# Altium PCB MT6816_Angle_Encoder.PcbDoc
Units mil, origin at the board's own origin, x right, y up, seen from the top; angles counter-clockwise.
Board outline 1175.45 x 1259.84 mil, 2 copper layers (Top Layer, Bottom Layer); 9 components, 8 nets, 34 pads, 6 vias.
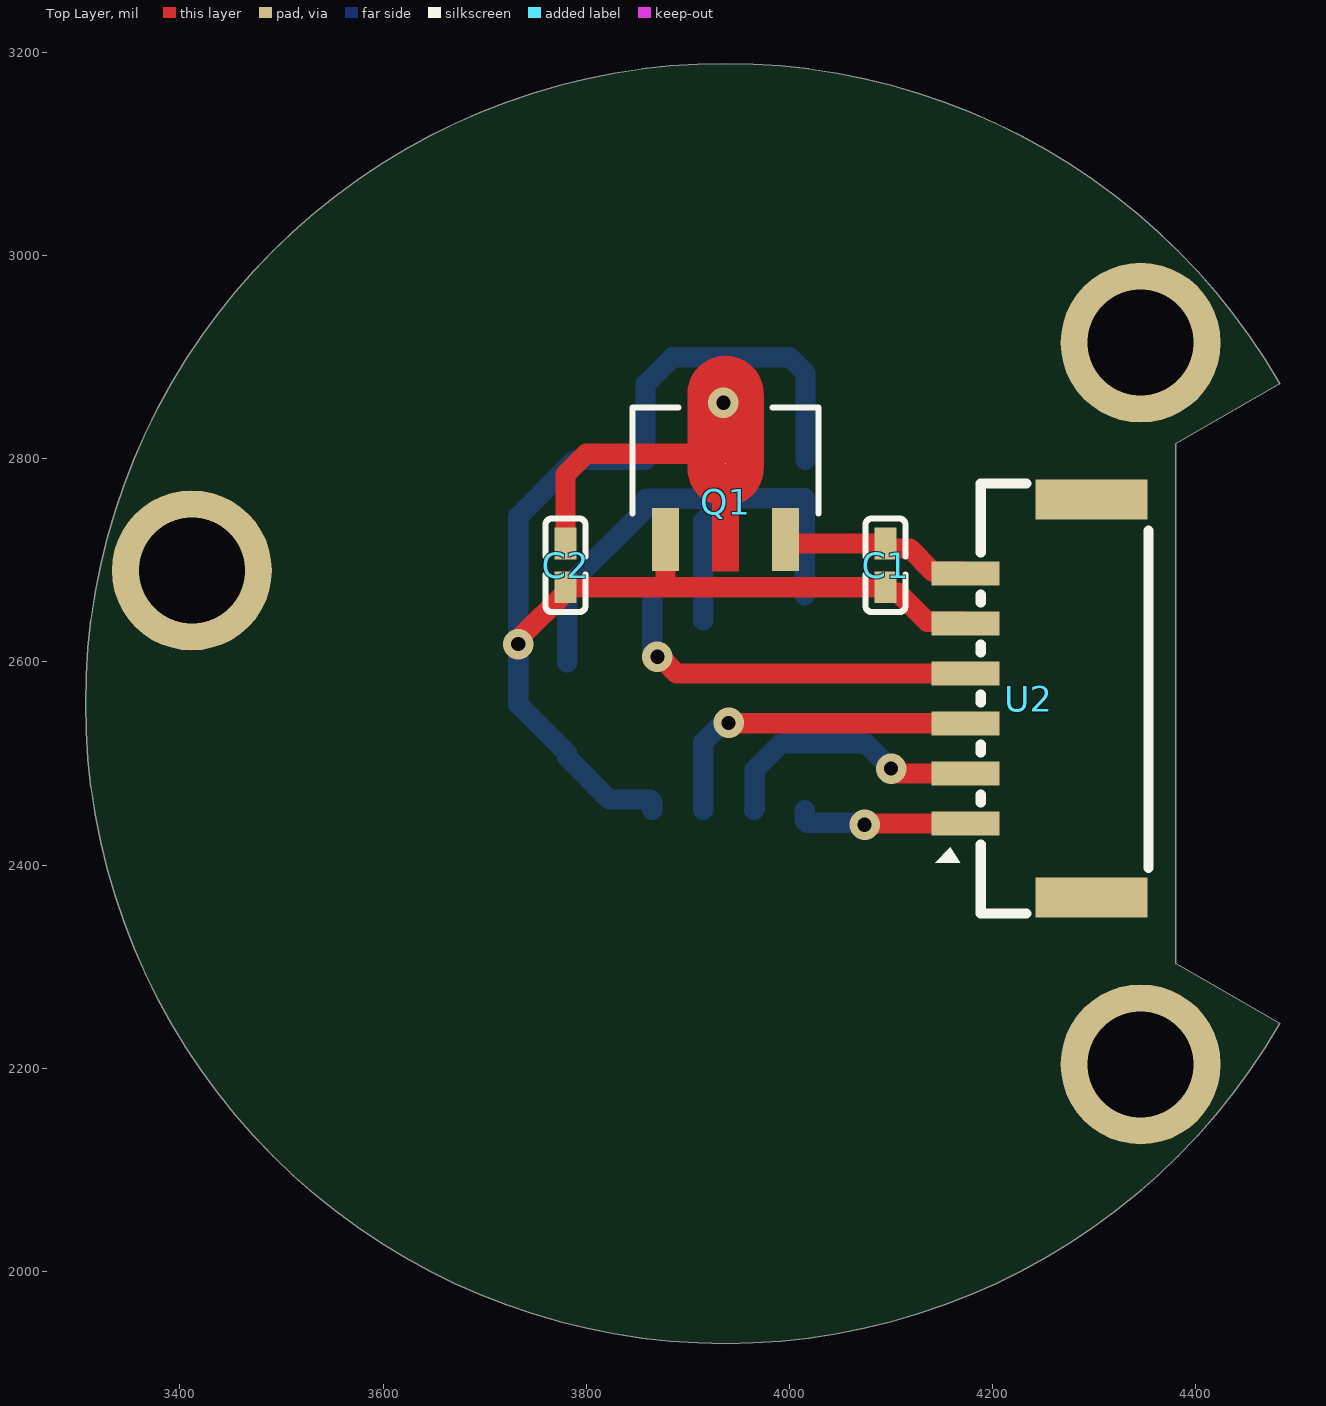
[diagram p0: Top Layer view]
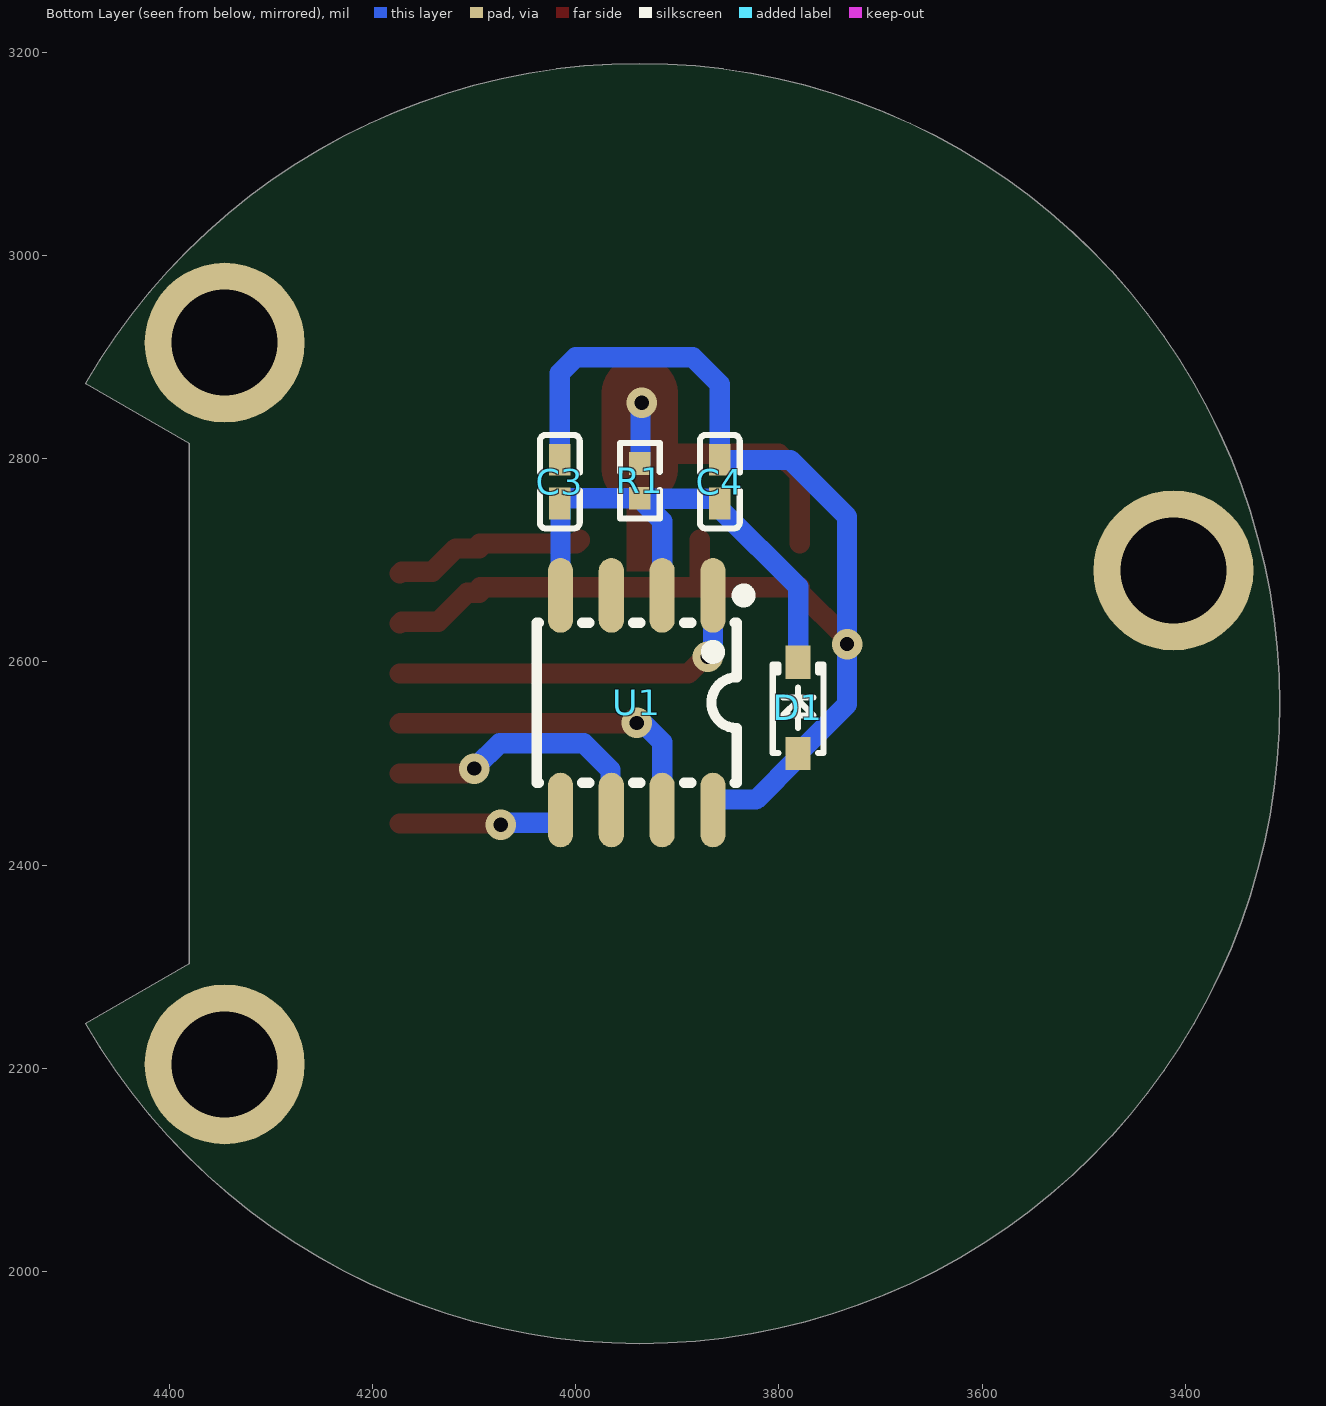
[diagram p1: Bottom Layer view, seen from below]

## Layer stack, top to bottom
Top Solder: solder mask 0.4, Solder Resist, Dk 3.5
Top Layer: signal copper 1.4
Dielectric 1: dielectric 12.6, FR-4, Dk 4.8
Bottom Layer: signal copper 1.4
Bottom Solder: solder mask 0.4, Solder Resist, Dk 3.5

## Board outline
4482.54,2244.09 cw(c3937.01,2559.06) 4482.54,2874.02 4380.25,2814.96 4380.25,2303.15

## Design rules (kind name [scope] priority, off if disabled: settings)
Clearance [All] p1: gap=6 ignorepadtopadclearanceinfootprint=FALSE except(0: Arc-Hole Track-Hole SMDPad-Hole THPad-Hole Via-Hole Fill-Hole Poly-Hole Region-Hole Text-Hole)
HoleSize [All] p1: absolutevalues=TRUE maxlimit=10000 minlimit=1 maxpercent=80.000 minpercent=20.000
HoleToHoleClearance [All] p1: gap=5 allowstackedmicrovias=TRUE
MinimumSolderMaskSliver [All] p1: minsoldermaskwidth=2
PlaneConnect [All] p1: planeconnectstyle=Direct reliefexpansion=20 reliefentries=4 reliefconductorwidth=10 reliefairgap=10
PolygonConnect [All] p1: connectstyle=Direct reliefconductorwidth=10 reliefentries=4 polygonreliefangle="90 Angle" airgapwidth=10
RoutingVias [All] p1: holewidth=14 width=30 viastyle="Through Hole" minholewidth=12 minwidth=24 maxholewidth=28 maxwidth=50
SilkToSilkClearance [All] p1: silktosilkclearance=0
SilkToSolderMaskClearance [IsPad] p1: minsilkscreentomaskgap=0 clearancetoexposedcopper=TRUE
SolderMaskExpansion [All] p1: expansion=4 istentingtop=FALSE
Width [All] p1: maxlimit=20 minlimit=10 preferedwidth=15
24 further rules are at their usual default settings.

## Classes and differential pairs
component class MT6816_Angle_Encoder: C3 C4 D1 Q1 R1 U2

## Components (designator, comment, footprint, x,y, rotation, side; value= is the part's Value field where it differs from the comment)
C1 "1uf" C0402 4094.49,2695.08 r270 top
C2 "1uf" C0402 3779.53,2695.08 r90 top
C3 "0.1uf" C0402 4015.75,2777.36 r270 bottom
C4 "0.1uf" C0402 3858.27,2777.36 r270 bottom
D1 "BZT52C5V6S_C19077441" SOD-323_L1.7-W1.3-LS2.6-RD 3781.14,2554.84 r270 bottom
Q1 "AMS1117-3.3V_C5120796" SOT-89-3_L4.5-W2.5-P1.50-LS4.2-BR 3937.01,2795.28 r270 top
R1 "10Ω" R0402 3937.01,2778.24 r90 bottom
U1 "MT6816CT-STD" SOP-8_L4.9-W3.9-P1.27-LS6.0-BL 3936.14,2559.84 r0 bottom locked
U2 "BX-GH1.25-6PWT" CONN-SMD_6P-P1.25_BX-GH1.25-6PWT 4249,2564 r90 top

## Footprints (in the part's own frame and the unit in brackets; to place one, negate y for a bottom-side part, rotate by r counter-clockwise, add the part's x,y. Pads: shape width x height; smd on the part's side, far side on the other; paste and mask are expansions set on the pad)
C0402 [mm]
  rect 0.79x0.54 smd paste-100 mask+0.051: 1(-0.545,0) 2(0.545,0)
  silkscreen extent -1.17,-0.5 1.17,0.5
CONN-SMD_6P-P1.25_BX-GH1.25-6PWT [mm]
  rect 0.6x1.7 smd paste+0 mask+0.05: 1(-3.126,1.925) 2(-1.876,1.925) 3(-0.626,1.925) 4(0.624,1.925) 5(1.874,1.925) 6(3.124,1.925)
  rect 1x2.8 smd paste+0 mask+0.05: 7(4.974,-1.225) 8(-4.976,-1.225)
  silkscreen extent -5.37,-2.65 5.37,2.69
R0402 [mm]
  rect 0.566x0.54 smd paste-100 mask+0.051: 1(-0.433,0) 2(0.433,0)
  silkscreen extent -0.94,-0.5 0.94,0.5
SOD-323_L1.7-W1.3-LS2.6-RD [mm]
  rect 0.83x0.63 smd paste+0 mask+0.05: 1(-1.14,0) 2(1.14,0)
  silkscreen extent -1.08,-0.64 1.13,0.64
SOP-8_L4.9-W3.9-P1.27-LS6.0-BL [mm]
  oval 0.63x1.865 smd paste+0 mask+0.051: 1(-1.807,-2.682) 2(-0.537,-2.682) 3(0.733,-2.682) 4(2.003,-2.682) 5(2.003,2.682) 6(0.733,2.682) 7(-0.537,2.682) 8(-1.807,2.682)
  silkscreen extent -2.72,-2.83 2.6,2
SOT-89-3_L4.5-W2.5-P1.50-LS4.2-BR [mil]
  rect 62.01x26.46 smd paste+0 mask+2: 1(74.84,-59.04) 3(74.84,59.07)
  round 1 smd: 2(0,0)
  Top Layer region: -68.45,37.4 4.55,37.4 6.3,37.36 8.05,37.24 9.79,37.03 11.52,36.74 13.24,36.38 14.93,35.93 16.61,35.4 18.25,34.8 19.87,34.12 21.45,33.36 23,32.53 24.5,31.63 25.96,30.66 27.38,29.63 28.74,28.53 30.05,27.36 31.3,26.13 32.5,24.85 33.63,23.51 34.7,22.13 35.71,20.69 36.64,19.2 37.51,17.68 38.3,16.11 39.02,12.99 105.84,12.99 105.84,-12.99 39.02,-12.99 38.3,-16.12 37.51,-17.68 36.64,-19.21 35.71,-20.69 34.7,-22.13 33.63,-23.52 32.5,-24.85 31.3,-26.14 30.05,-27.36 28.74,-28.53 27.38,-29.63 25.96,-30.67 24.5,-31.64 23,-32.54 21.45,-33.37 19.87,-34.12 18.25,-34.8 16.61,-35.41 14.93,-35.93 13.24,-36.38 11.52,-36.75 9.79,-37.03 8.05,-37.24 6.3,-37.36 4.55,-37.4 -68.45,-37.4 -70.2,-37.36 -71.95,-37.24 -73.7,-37.03 -75.43,-36.75 -77.14,-36.38 -78.84,-35.93 -80.51,-35.41 -82.15,-34.8 -83.77,-34.12 -85.35,-33.37 -86.9,-32.54 -88.4,-31.64 -89.86,-30.67 -91.28,-29.63 -92.64,-28.53 -93.95,-27.36 -95.21,-26.14 -96.4,-24.85 -97.54,-23.52 -98.61,-22.13 -99.61,-20.69 -100.55,-19.21 -101.41,-17.68 -102.2,-16.12 -102.92,-14.52 -103.56,-12.89 -104.13,-11.22 -104.62,-9.54 -105.02,-7.83 -105.35,-6.11 -105.6,-4.38 -105.76,-2.63 -105.84,-0.88 -105.84,0.88 -105.76,2.63 -105.6,4.37 -105.35,6.11 -105.02,7.83 -104.62,9.54 -104.13,11.22 -103.56,12.88 -102.92,14.51 -102.2,16.11 -101.41,17.68 -100.55,19.2 -99.61,20.69 -98.61,22.12 -97.54,23.51 -96.4,24.85 -95.21,26.13 -93.95,27.36 -92.64,28.53 -91.28,29.63 -89.86,30.66 -88.4,31.63 -86.9,32.53 -85.35,33.36 -83.77,34.12 -82.15,34.8 -80.51,35.4 -78.84,35.93 -77.14,36.38 -75.43,36.74 -73.7,37.03 -71.95,37.24 -70.2,37.36
  silkscreen extent -55,-92 49,92

## Part data
C1 C2 C3 C4: library part CC0402KRX6S5BB225
R1: library part PTFR0402B30K0P9

## Free pads (board coordinates)
  round 157.48 hole 104.33: 2(4345.56,2914.21) 3(4345.56,2203.91) 4(3411.75,2690.02)

## Via types
v1: diameter 30, hole 14, Top Layer to Bottom Layer, 6 vias

## Nets (pads, with @x,y where several pads share a name; then routed paths per layer and width w, separated by ;. In a path a pad name is that pad's centre, name@x,y a point inside that pad or via, vN(x,y) a via of type N, cw(c..) or ccw(c..) an arc to the next point about the centre after c; other vN are vias at no path point)
3.3V: C2.2 Q1.2 R1.2 | length 298.5
  Top Layer w20: C2.2 3779.53,2784.53 3800,2805 3927.28,2805 Q1.2
  Bottom Layer w20: v1(3935,2855) 3936.38,2853.62 3936.38,2795.91 R1.2
GND: C1.2 C2.1 C3.1 C4.1 D1.2 Q1.1 U1.8 U2.5 | length 1373.9
  Top Layer w20: v1(3733,2617.56) 3734.91,2619.47 3734.91,2624.08 C2.1@3779.53,2668.69 ; C2.1 3881.01,2673.62 3881.19,2673.43 C1.2@4094.3,2673.43 ; 3877.96,2673.62 Q1.1 ; C1.2@4094.49,2668.69 4095.12,2668.06 4106.94,2668.06 4135.39,2639.61 4171.42,2639.61 U2.5
  Bottom Layer w20: U1.8 3864.99,2462.36 3862.77,2464.58 3822.59,2464.58 3781.14,2506.03 D1.2 3733,2558.1 v1(3733,2617.56) 3733,2743 3788.82,2798.82 C4.1 3858.27,2873.27 3885,2900 4000,2900 4015.75,2884.25 C3.1
NetC3_2: C3.2 C4.2 D1.1 R1.1 U1.2 U1.4 | length 562.6
  Bottom Layer w20: D1.1 3781.14,2673.86 3858.27,2750.98 3858.27,2760.06 3858.9,2760.69 R1.1@3937.01,2760.69 ; U1.2@3914.99,2641.14 U1.2 3914.99,2738.67 R1.1@3932.22,2755.91 ; R1.1 4015.12,2761.2 C3.2@4015.12,2750.35 ; U1.4 C3.2@4014.99,2745.92
SPI_CSN: U1.1 U2.4 | length 372.6
  Top Layer w20: v1(3870,2605) 3872.71,2605 3889.12,2588.58 U2.4
  Bottom Layer w20: U1.1 3864.99,2610.01 v1(3870,2605)
SPI_MISO: U1.6 U2.2 | length 268.9
  Top Layer w20: v1(4100,2495) 4102.71,2495 4107.55,2490.16 U2.2
  Bottom Layer w20: U1.6 3965.91,2455.15 3965.91,2493.94 3991.96,2520 4075,2520 v1@4098.85,2496.15
SPI_MOSI: U1.5 U2.1 | length 170.8
  Top Layer w20: v1(4073.92,2439.78) 4075.09,2440.94 U2.1
  Bottom Layer w20: U1.5 4014.99,2443.91 4017.21,2441.69 4072.01,2441.69 v1(4073.92,2439.78)
SPI_SCLK: U1.7 U2.3 | length 333.1
  Top Layer w20: v1(3940,2540) 3940.32,2539.68 4172.91,2539.68 U2.3
  Bottom Layer w20: U1.7 3914.99,2520.95 3932.14,2538.09 3938.09,2538.09 v1(3940,2540)
VDD: C1.1 Q1.3 U2.6 | length 193.9
  Top Layer w20: Q1.3 3996.07,2719.76 3999.3,2716.54 C1.1 4094.49,2712.35 4095.12,2711.72 4118.28,2711.72 4141.18,2688.82 4171.42,2688.82 U2.6
pads on no net: U1.3 U2.7 U2.8

## Silkscreen, mask and mechanical layers (free items; w line width, h text height)
Mechanical 1:
  the board outline again, w10